# EAGLE board square_wave_amit (EAGLE 9.6.2)
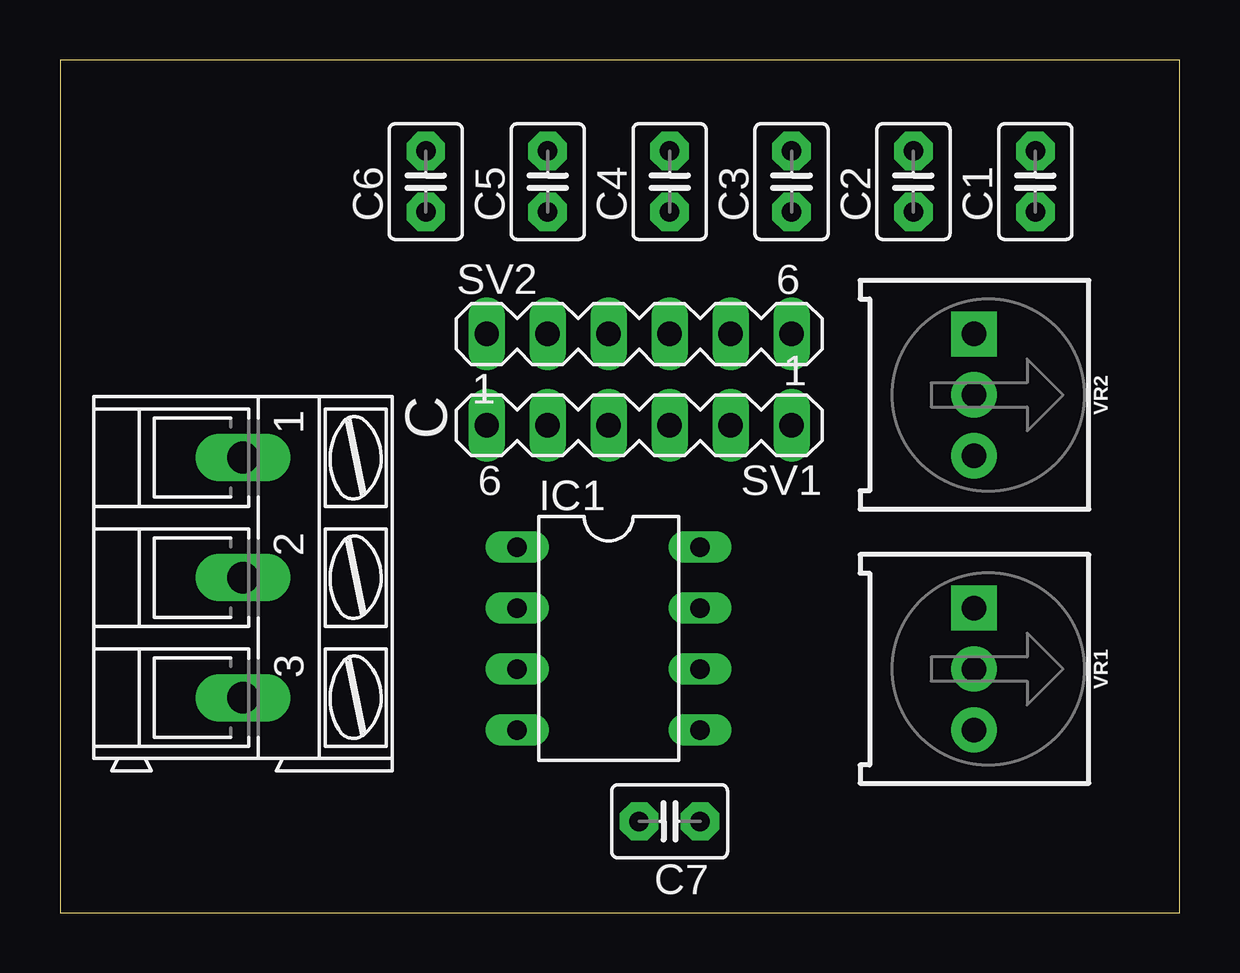
[diagram p0: board, top side]
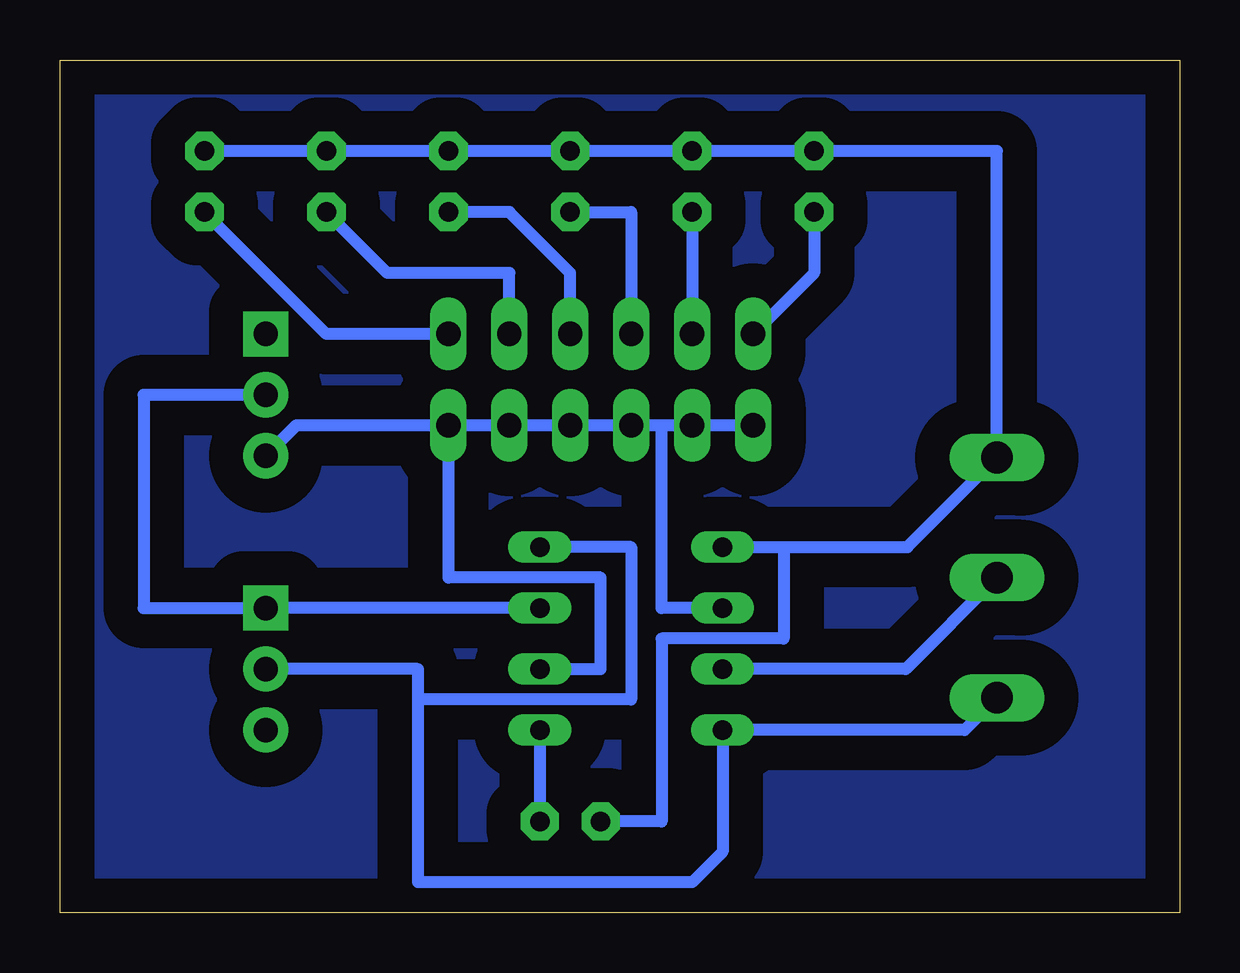
[diagram p1: board, bottom side, seen from below]

Size 46.66 x 35.55 mm. Coordinates in mm from the lower left corner, seen from the top.
Outline: 0,0 46.66,0 46.66,35.55 0,35.55 0,0
Copper layers (1*16): Top 0.035mm / dielectric 1.5mm / Bottom 0.035mm
Design rules "default": minimum track width 6mil, minimum drill 0.35mm, track to track 6mil, track to pad 6mil, pad to pad 6mil, via to via 6mil, smd to smd 6mil, copper to edge 40mil, drill to drill 6mil, minimum pad ring 10mil, minimum via ring 8mil, stop-mask expansion 4mil, vias tented up to drill 0mil, thermal gap 10mil

## Footprints (pad centres in the part's own frame; a part is rotated, then mirrored left to right if it is on the bottom)
AK300/3 = drill 1.321 long: 1 -5.004,0; 2 0,0; 3 5.004,0
C2.5-3 = drill 0.813 pad 1.6 octagon: 1 -1.27,0; 2 1.27,0
DIL-08 = drill 0.813 long: 1 -3.81,-3.81; 2 -1.27,-3.81; 3 1.27,-3.81; 4 3.81,-3.81; 5 3.81,3.81; 6 1.27,3.81; 7 -1.27,3.81; 8 -3.81,3.81
MA06-1 = drill 1.016 long: 1 -6.35,0; 2 -3.81,0; 3 -1.27,0; 4 1.27,0; 5 3.81,0; 6 6.35,0
TRIMPOT-PTH-3386U = drill 1.016 pad 1.88 square: 1 -2.54,-0.015 | drill 1.016 pad 1.88: 2 0,-0.015; 3 2.54,-0.015

## Placement (x,y rotation side)
C  [AK300/3]  7.62,13.97 270 top
C1  30pf  [C2.5-3]  40.64,30.48 90 top
C2  1nf  [C2.5-3]  35.56,30.48 90 top
C3  10nf  [C2.5-3]  30.48,30.48 90 top
C4  100nf  [C2.5-3]  25.4,30.48 90 top
C5  1uf  [C2.5-3]  20.32,30.48 90 top
C6  10uf  [C2.5-3]  15.24,30.48 90 top
C7  10nf  [C2.5-3]  25.4,3.81 180 top
IC1  NE555  [DIL-08]  22.86,11.43 270 top
SV1  [MA06-1]  24.13,20.32 180 top
SV2  [MA06-1]  24.13,24.13 0 top
VR1  10k  [TRIMPOT-PTH-3386U]  38.1,10.16 270 top
VR2  100k  [TRIMPOT-PTH-3386U]  38.1,21.59 270 top

## Library data of the parts
C = con-ptr500; OC_FARNELL: unknown; OC_NEWARK: unknown
C1-C7 = capacitor-wima; SPICEPREFIX: C
IC1 = st-microelectronics; MF: Arrow Electronics; MPN: NE555N; OC_FARNELL: 1467742; OC_NEWARK: 89K1486; SPICEPREFIX: X
SV1 SV2 = con-lstb; OC_FARNELL: unknown; OC_NEWARK: unknown
VR1 = SparkFun-Resistors; PROD_ID: RES-09730; SF_SKU: COM-09806; SPICEMODEL: DMOD; SPICEPREFIX: M
VR2 = SparkFun-Resistors; PROD_ID: RES-09730; SF_SKU: COM-09806; SPICEMODEL: DMOD; SPICEPREFIX: J

## Nets
GND: C1.2 C2.2 C3.2 C4.2 C5.2 C6.2 C7.2 C.1 IC1.1
N$1: C2.1 SV2.5
N$2: C1.1 SV2.6
N$3: C.3 IC1.4 IC1.8 VR1.2
N$4: C7.1 IC1.5
N$6: IC1.7 VR1.1 VR2.2
N$8: C6.1 SV2.1
N$9: C5.1 SV2.2
N$10: C4.1 SV2.3
N$11: C3.1 SV2.4
N$12: C.2 IC1.3
N$14: IC1.2 IC1.6 SV1.1 SV1.2 SV1.3 SV1.4 SV1.5 SV1.6 VR2.3

## Tracks (layer width: path | path; a pad name or v marks a point on that pad's centre or on a via)
GND
  Bottom 0.508: C1.2 C2.2 C3.2 C4.2 C5.2 C6.2 7.62,31.75 C.1 11.35,15.24 16.51,15.24 | IC1.1 16.51,15.24 | 16.51,15.24 16.51,11.43 21.59,11.43 21.59,3.81 C7.2
N$1
  Bottom 0.508: SV2.5 27.94,26.67 33.02,26.67 C2.1
N$2
  Bottom 0.508: SV2.6 35.56,24.13 C1.1
N$3
  Bottom 0.508: C.3 8.97,7.62 IC1.4 19.05,2.54 20.32,1.27 31.75,1.27 31.75,8.89 | VR1.2 31.75,10.16 31.75,8.89 | IC1.8 22.86,15.24 22.86,8.89 31.75,8.89
N$4
  Bottom 0.508: IC1.5 C7.1
N$6
  Bottom 0.508: VR2.2 43.18,21.59 43.18,12.7 VR1.1 IC1.7
N$8
  Bottom 0.508: C6.1 15.24,26.67 SV2.1
N$9
  Bottom 0.508: C5.1 SV2.2
N$10
  Bottom 0.508: C4.1 22.86,29.21 SV2.3
N$11
  Bottom 0.508: SV2.4 25.4,26.67 27.94,29.21 C3.1
N$12
  Bottom 0.508: C.2 11.43,10.16 IC1.3
N$14
  Bottom 0.508: SV1.6 SV1.5 21.59,20.32 | 21.59,20.32 SV1.4 SV1.3 SV1.2 SV1.1 | IC1.6 24.13,10.16 24.13,13.97 30.48,13.97 SV1.1 | IC1.2 21.59,12.7 21.59,20.32 | SV1.1 36.81,20.32 VR2.3
PCB
  pour Bottom (isolate 1.422): 0,35.56 46.99,35.56 46.99,0 0,0